# Altium PCB SIPROKAR_PDU.PcbDoc
Units mm, origin at the board's own origin, x right, y up, seen from the top; angles counter-clockwise.
Board outline 50 x 100 mm, 2 copper layers (Top Layer, Bottom Layer); 9 components, 11 nets, 31 pads, 0 vias.
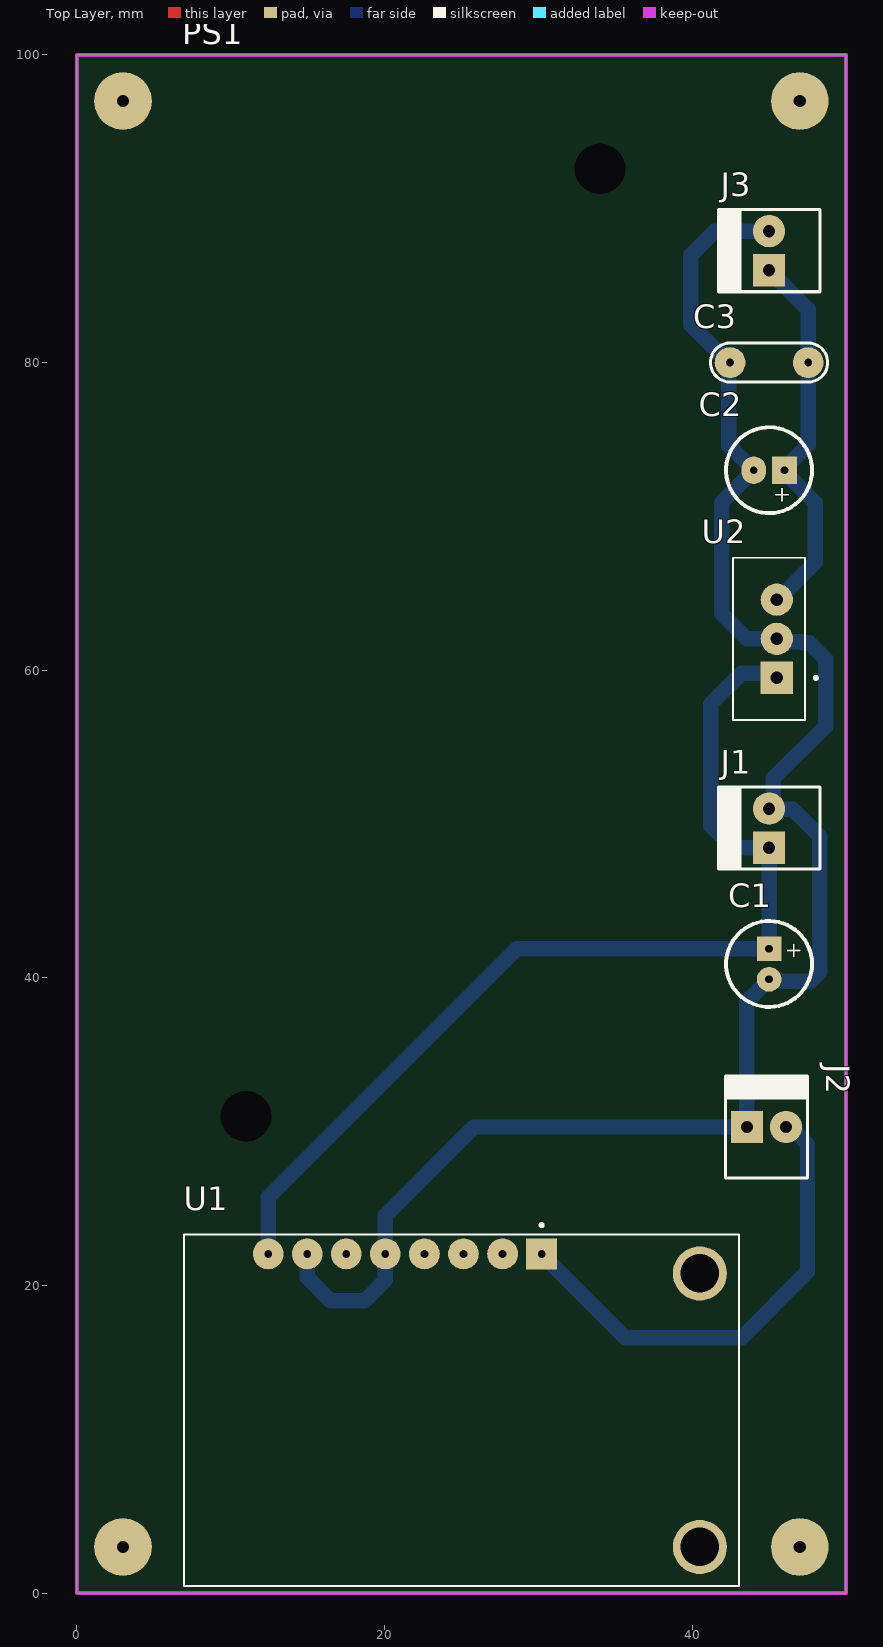
[diagram p0: Top Layer view]
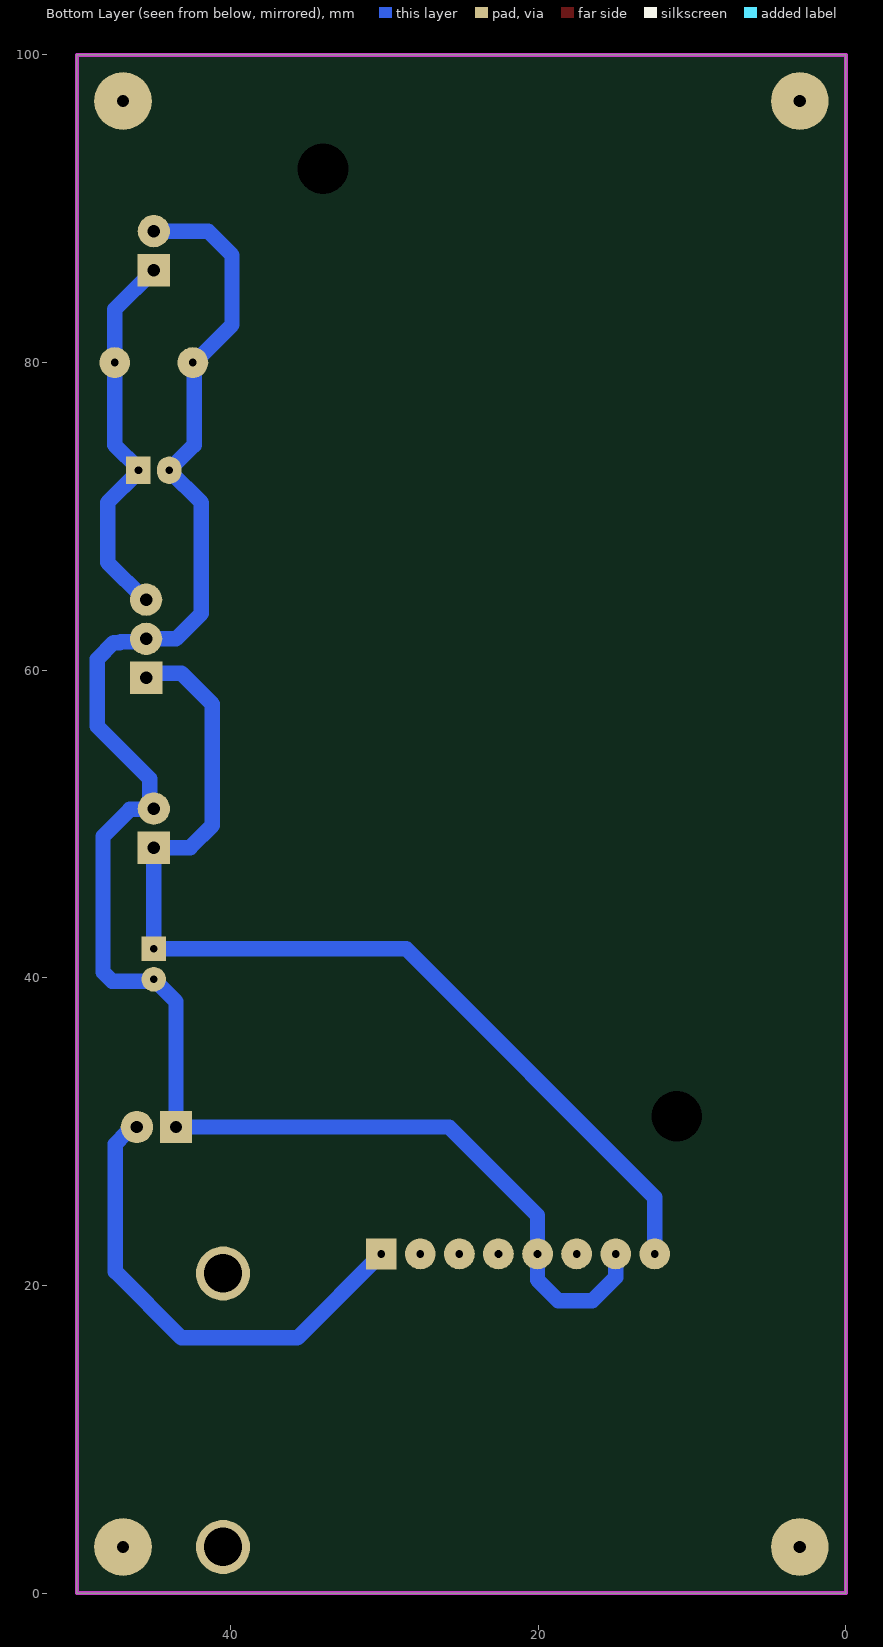
[diagram p1: Bottom Layer view, seen from below]
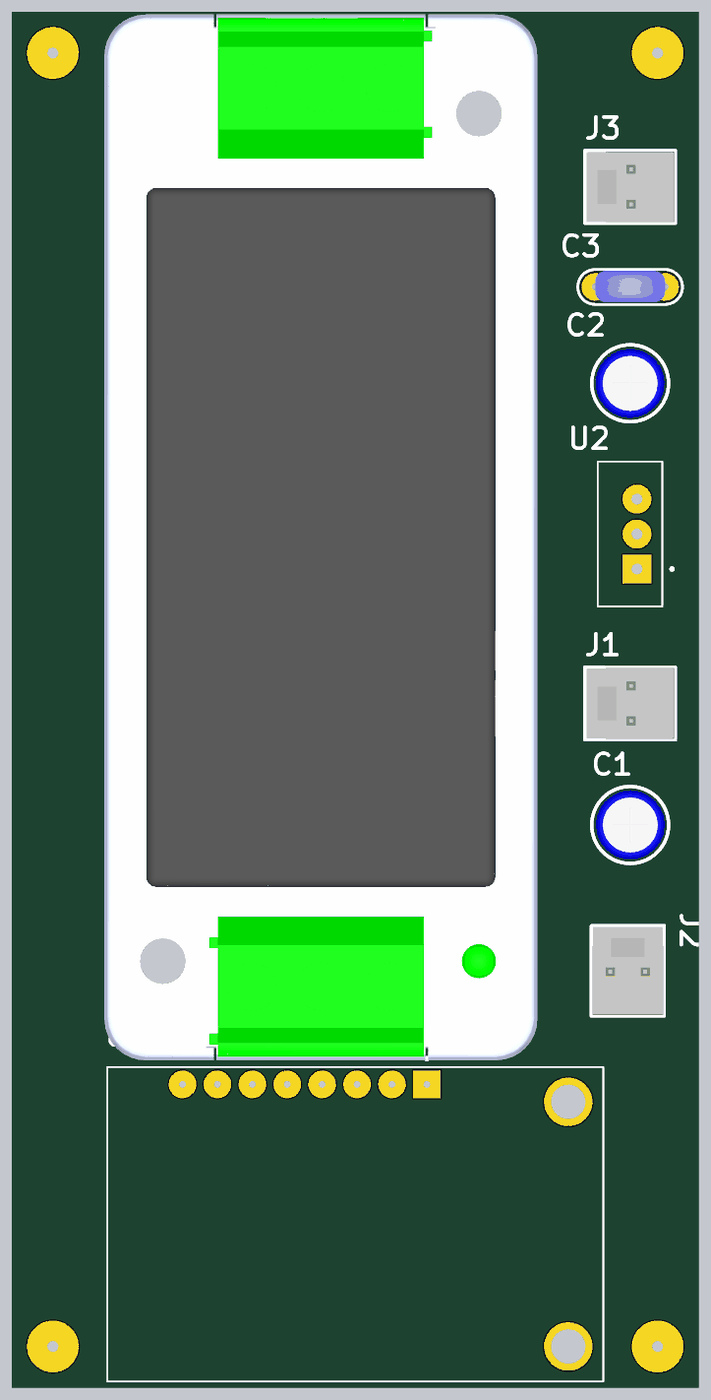
[diagram p2: 3D render of the assembled board from above, using the file's embedded part models]

## Layer stack, top to bottom
Top Solder: solder mask 0.0102, Solder Resist, Dk 3.5
Top Layer: signal copper 0.0356
Dielectric 1: dielectric 0.32, FR-4, Dk 4.8
Bottom Layer: signal copper 0.0356
Bottom Solder: solder mask 0.0102, Solder Resist, Dk 3.5

## Board outline
0,0 0,100 50,100 50,0

## Design rules (kind name [scope] priority, off if disabled: settings)
Clearance [All] p1: gap=0.7 ignorepadtopadclearanceinfootprint=TRUE
PolygonConnect [All] p1: connectstyle=Relief reliefconductorwidth=0.254 reliefentries=4 polygonreliefangle="90 Angle" airgapwidth=0.254
RoutingVias [All] p1: holewidth=0.711 width=1.27 viastyle="Through Hole" minholewidth=0.711 minwidth=1.27 maxholewidth=0.711 maxwidth=1.27
SilkToSolderMaskClearance [IsPad] p1: minsilkscreentomaskgap=0 clearancetoexposedcopper=TRUE
SolderMaskExpansion [All] p1: expansion=0.102 istentingtop=FALSE
Width [All] p1: maxlimit=1 minlimit=0.254 preferedwidth=0.7
29 further rules are at their usual default settings.

## Components (designator, comment, footprint, x,y, rotation, side; value= is the part's Value field where it differs from the comment)
C1 "10uF" CAP100RP#1 45,40.9 r270 top
C2 "10uF" CAP100RP#2 45,73 r180 top
C3 "100nF" CAP200 45,80 r180 top
J1 "Header V" MOLEX2 45,48.46 r90 top
J2 "MOLEX2" MOLEX2 43.56,30.3 r0 top
J3 "MOLEX2" MOLEX2 45,86 r90 top
PS1 "PYBE20-Q24-S5-T" PYBE20-Q24-S5-T 38.25,99.8 r180 top
U1 "2465" MODULE_2465 25.006,11.89 r180 top
U2 "LM3940IT-3.3" TO254P1054X470X1955-3 45.5,62.04 r90 top

## Footprints (in the part's own frame and the unit in brackets; to place one, negate y for a bottom-side part, rotate by r counter-clockwise, add the part's x,y. Pads: shape width x height; smd on the part's side, far side on the other; paste and mask are expansions set on the pad)
CAP100RP#1 [mm] "Body diameter 5mm"
  rect 1.6x1.6 hole 0.5: 1(-1,0)
  round 1.6 hole 0.5: 2(1,0)
  silkscreen extent -2.79,-2.79 2.79,2.79, body extent -2.53,-2.51 2.53,2.54, height 11.53
CAP100RP#2 [mm] "Body diameter 5mm"
  rect 1.6x1.8 hole 0.5: 1(-1,0)
  oval 1.6x1.8 hole 0.5: 2(1,0)
  silkscreen extent -2.79,-2.79 2.79,2.79, body extent -2.53,-2.51 2.53,2.54, height 11.53
CAP200 [mm]
  round 2 hole 0.5: 1(-2.54,0) 2(2.54,0)
  silkscreen extent -3.81,-1.27 3.81,1.27, body extent -2.79,-1.17 2.79,1.12, height 6.24
MODULE_2465 [mm]
  rect 2x2 hole 0.5: 1(-5.207,-10.16)
  round 2 hole 0.5: 2(-2.667,-10.16) 3(-0.127,-10.16) 4(2.413,-10.16) 5(4.953,-10.16) 6(7.493,-10.16) 7(10.033,-10.16) 8(12.573,-10.16)
  round 3.516 hole 2.5: P1(-15.494,-8.89) P2(-15.494,8.89)
  silkscreen extent -18.03,-12.13 18.03,11.43
MOLEX2 [mm]
  rect 2.1x2.1 hole 0.8: 1(0,0)
  round 2.1 hole 0.8: 2(2.54,0)
  silkscreen extent -1.4,-3.3 3.94,3.3, body extent -1.27,-3.17 3.81,3.18, height 10.74
PYBE20-Q24-S5-T [mm]
  round 1.524 hole 3.3: 1(4.25,7.2) 1(27.25,68.8)
  body extent 0,0 31.5,76, height 21.2
TO254P1054X470X1955-3 [mm]
  rect 2.1x2.1 hole 0.8: 1(-2.54,0)
  round 2.1 hole 0.8: 2(0,0) 3(2.54,0)
  silkscreen extent -5.27,-2.64 5.27,2.86

## Part data
C1 C2: library part CAPPOL
C3: library part CAP
J1: library part MOLEX2
PS1: "DC-DC Converters"
U1: library part CMP-025-000000-1, "PowerBoost 1000 Charger - Rechargeable 5V Lipo USB Boost at 1A - 1000C", Package=None, Availability="In Stock", Check_prices=https://www.snapeda.com/parts/2465/Adafruit+Industries+LLC/view-part/?ref=eda, Component Type=Standard, Design Item ID=2465, MF="Adafruit Industries", MP=2465, Pin Count=8, Price=None, SnapEDA_Link=https://www.snapeda.com/parts/2465/Adafruit+Industries+LLC/view-part/?ref=snap, Source=2465.SchLib
U2: library part CMP-009-000002-1, "1A Low Dropout Regulator for 5V to 3.3V Conversion", Package="TO-220-3 Texas Instruments", Arrow_Electronics-Purchase-URL=https://snapeda.com/shop?store=Arrow+Electronics&id=50719, Availability=Unavailable, Component Type=Standard, Design Item ID=LM3940IT-3.3, DigiKey-Purchase-URL=https://snapeda.com/shop?store=DigiKey&id=50719, MF="Texas Instruments", Mouser-Purchase-URL=https://snapeda.com/shop?store=Mouser&id=50719, MP=LM3940IT-3.3/NOPB, Pin Count=3, Price=None, SnapEDA_Link=https://www.snapeda.com/parts/LM3940IT-3.3/NOPB/Texas%20Instruments/view-part/50719/?ref=snap, Source=LM3940IT-3.3.SchLib, Texas_Instruments-Purchase-URL=https://snapeda.com/shop?store=Texas+Instruments&id=50719

## Free pads (board coordinates)
  round 3.75 hole 0.8: 2(3,3) 2(3,97) 2(47,3) 2(47,97)

## Nets (pads, with @x,y where several pads share a name; then routed paths per layer and width w, separated by ;. In a path a pad name is that pad's centre, name@x,y a point inside that pad or via, vN(x,y) a via of type N, cw(c..) or ccw(c..) an arc to the next point about the centre after c; other vN are vias at no path point)
GND: C1.2 C2.2 C3.2 J1.2 J2.1 J3.2 U1.5 U1.7 U2.2 | length 115.5
  Bottom Layer w1: U1.7 14.979,22.044 14.979,20.521 16.5,19 18.7,19 20.053,20.353 U1.5 20.053,24.553 25.8,30.3 J2.1 43.56,38.46 C1.2 45.162,39.9 45.277,39.785 47.714,39.785 48.3,40.371 48.3,49.2 46.553,50.947 45.053,50.947 J1.2 45.268,51.268 45.268,52.945 48.673,56.35 48.673,60.727 47.609,61.791 47.209,61.791 47.151,61.849 45.691,61.849 U2.2 43.56,62.04 41.914,63.686 41.914,70.886 44,72.971 C2.2 42.374,74.626 42.374,79.914 C3.2 42.36,80 39.914,82.446 39.914,86.986 41.454,88.526 J3.2@44.986,88.526
NetD1_1: 
NetQ1_1: 
NetQ1_2: 
NetQ1_3: U1.3
NetR1_1: U1.4
NetR3_2: U1.6
PWR_3.3V: C2.1 C3.1 J3.1 U2.3 | length 25
  Bottom Layer w1: J3.1 47.54,83.46 C3.1 47.54,74.64 46,73.1 C2.1 46,72.9 48,70.9 48,67 45.58,64.58 U2.3
PWR_5V: C1.1 J1.1 U1.8 U2.1 | length 67.1
  Bottom Layer w1: U1.8 12.433,25.733 28.6,41.9 C1.1 J1.1 42.64,48.46 41.2,49.9 41.2,57.8 43.2,59.8 45.2,59.8 U2.1
VBUS: J2.2 U1.1 | length 31.5
  Bottom Layer w1: U1.1 35.663,16.6 43.2,16.6 47.5,20.9 47.5,29.2 46.8,29.9 46.716,29.9 46.316,30.3 J2.2
VLIPO: U1.2
pads on no net: PS1.1 U1.P1 U1.P2

## Keep-outs
Keep-Out Layer:
  the board outline again, w0.254

## Text inside footprints (layer, text, board x,y; h text height)
C1: Top Overlay "+" at 46.168,42.348 h1.02 r270
C2: Top Overlay "+" at 46.448,71.832 h1.02 r180